# EAGLE board ROM-BANK_004 (EAGLE 6.3)
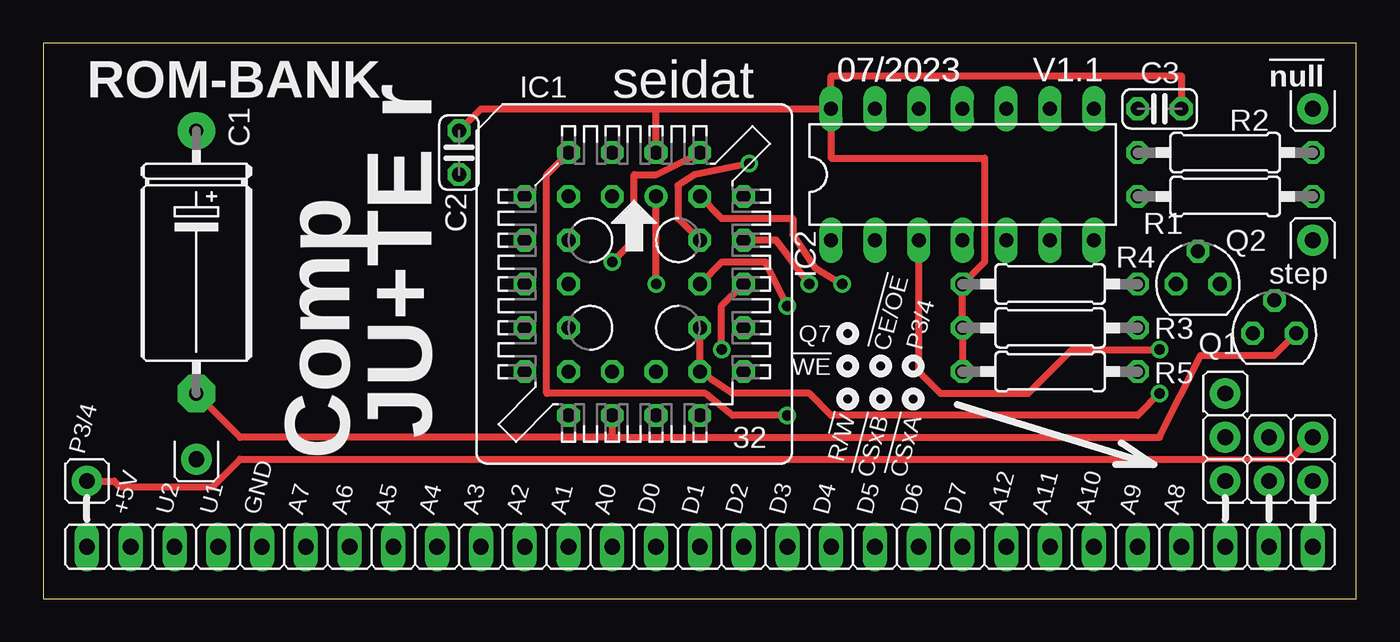
[diagram p0: board, top side]
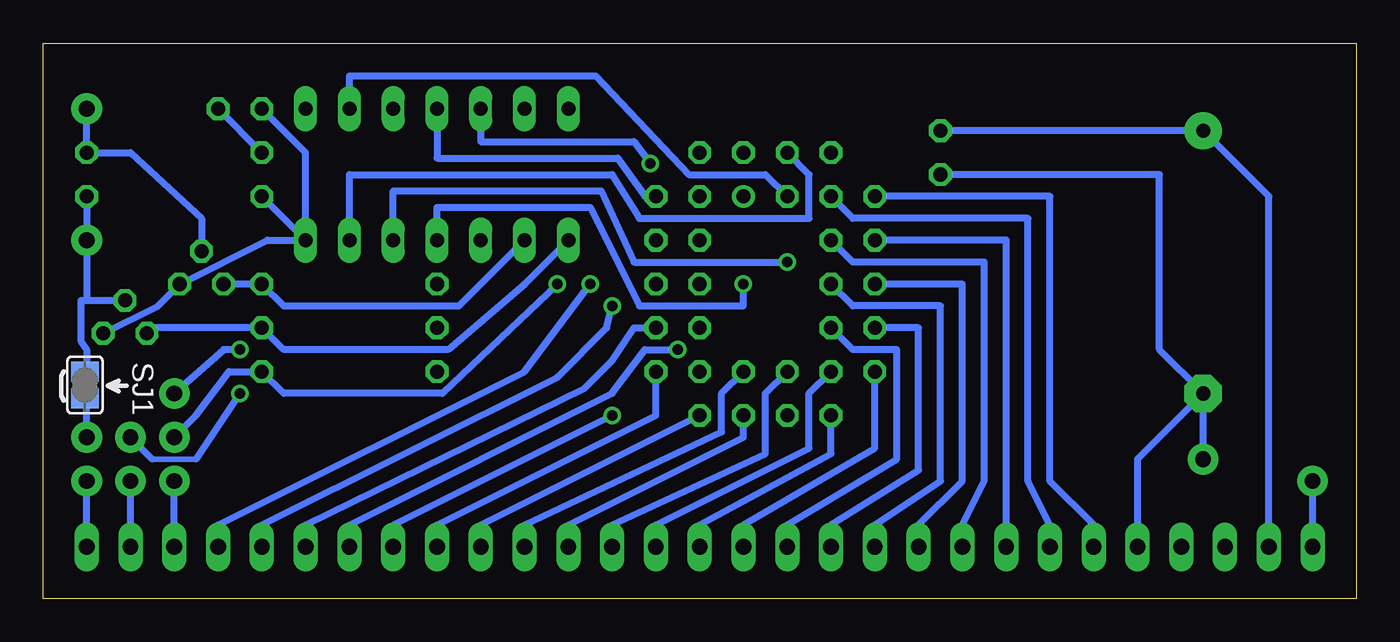
[diagram p1: board, bottom side, seen from below]

Size 76.19 x 32.22 mm. Coordinates in mm from the lower left corner, seen from the top.
Outline: 0,0 76.19,0 76.19,32.22 0,32.22 0,0
Copper layers (1*16): Top 0.035mm / dielectric 1.5mm / Bottom 0.035mm
Design rules "default": minimum track width 10mil, minimum drill 24mil, track to track 8mil, track to pad 8mil, pad to pad 8mil, via to via 8mil, smd to smd 8mil, copper to edge 40mil, drill to drill 8mil, minimum pad ring 10mil, minimum via ring 8mil, stop-mask expansion 4mil, vias tented up to drill 0mil, thermal gap 10mil

## Footprints (pad centres in the part's own frame; a part is rotated, then mirrored left to right if it is on the bottom)
JP1-1B = drill 0.914 pad 1.778: 1 0,0
E15-6 = drill 0.813 pad 2.159: + -7.62,0 | drill 0.813 pad 2.159 octagon: - 7.62,0
C025-024X044 = drill 0.813 octagon: 1 -1.27,0; 2 1.27,0
PLCC-32-SOCKET = drill 0.813: 1 1.27,5.08 | drill 0.813 octagon: 2 -1.27,7.62; 3 -1.27,5.08; 4 -3.81,7.62; 5 -6.35,5.08; 6 -3.81,5.08; 7 -6.35,2.54; 8 -3.81,2.54; 9 -6.35,0; 10 -3.81,0; 11 -6.35,-2.54; 12 -3.81,-2.54; 13 -6.35,-5.08; 14 -3.81,-7.62; 15 -3.81,-5.08; 16 -1.27,-7.62; 17 -1.27,-5.08; 18 1.27,-7.62; 19 1.27,-5.08; 20 3.81,-7.62; 21 6.35,-5.08; 22 3.81,-5.08; 23 6.35,-2.54; 24 3.81,-2.54; 25 6.35,0; 26 3.81,0; 27 6.35,2.54; 28 3.81,2.54; 29 6.35,5.08; 30 3.81,7.62; 31 3.81,5.08; 32 1.27,7.62
DIL14 = drill 0.813 long: 1 -7.62,-3.81; 2 -5.08,-3.81; 3 -2.54,-3.81; 4 0,-3.81; 5 2.54,-3.81; 6 5.08,-3.81; 7 7.62,-3.81; 8 7.62,3.81; 9 5.08,3.81; 10 2.54,3.81; 11 0,3.81; 12 -2.54,3.81; 13 -5.08,3.81; 14 -7.62,3.81
SOT54E = drill 0.813 octagon: D -1.27,0; G 0,1.905; S 1.27,0
0207/10 = drill 0.813 octagon: 1 -5.08,0; 2 5.08,0
SJ = smd 1.168 x 1.6: 1 -0.762,0; 2 0.762,0
BUS29_PUR = drill 0.914 long: 1.1 0,0; 1.2 0,2.54; 1.3 0,5.08; 1.4 0,7.62; 1.5 0,10.16; 1.6 0,12.7; 1.7 0,15.24; 1.8 0,17.78; 1.9 0,20.32; 1.10 0,22.86; 1.11 0,25.4; 1.12 0,27.94; 1.13 0,30.48; 1.14 0,33.02; 1.15 0,35.56; 1.16 0,38.1; 1.17 0,40.64; 1.18 0,43.18; 1.19 0,45.72; 1.20 0,48.26; 1.21 0,50.8; 1.22 0,53.34; 1.23 0,55.88; 1.24 0,58.42; 1.25 0,60.96; 1.26 0,63.5; 1.27 0,66.04; 1.28 0,68.58; 1.29 0,71.12

## Placement (x,y rotation side)
!NULL  [JP1-1B]  73.66,28.41 90 top
C1  200µ  [E15-6]  8.89,19.52 270 top
C2  100n  [C025-024X044]  24.13,25.87 270 top
C3  100n  [C025-024X044]  64.77,28.41 180 top
IC1  SST39VF040SOCKET  [PLCC-32-SOCKET]  34.29,18.25 0 top
IC2  4024N  [DIL14]  53.34,24.6 0 top
Q1  BS170  [SOT54E]  71.44,15.39 0 top
Q2  BS170  [SOT54E]  67,18.25 0 top
Q7  [JP1-1B]  68.58,11.9 270 top
R1  100k  [0207/10]  68.58,23.33 0 top
R2  100k  [0207/10]  68.58,25.87 180 top
R3  10k  [0207/10]  58.42,15.71 180 top
R4  10k  [0207/10]  58.42,18.25 180 top
R5  10k  [0207/10]  58.42,13.17 180 top
R/!W  [JP1-1B]  68.58,6.82 0 top
SCHRITT  [JP1-1B]  73.66,20.79 270 top
SJ1  [SJ]  73.76,12.39 270 bottom
U$1  BUS2929PUR  [BUS29_PUR]  2.54,3.01 270 top
U$2  [JP1-1B]  8.89,8.09 90 top
U$3  [JP1-1B]  73.66,9.36 180 top
U$4  [JP1-1B]  68.58,9.36 270 top
U$6  [JP1-1B]  2.54,6.82 90 top
U$8  [JP1-1B]  73.66,6.82 180 top
U$9  [JP1-1B]  71.12,6.82 180 top
U$10  [JP1-1B]  71.12,9.36 270 top

## Library data of the parts
!NULL Q7 R/!W SCHRITT U$1-U$4 U$6 U$8-U$10 = NRF24L01_Radio
C1-C3 R1-R5 = rcl
IC1 = memory
IC2 = 40xx
Q1 Q2 = transistor-small-signal
SJ1 = jumper

## Nets
!CE&OE: IC1.22 IC1.24 U$10.1
!CS1A: U$1.1.29 U$8.1
!CS1B: U$1.1.28 U$9.1
!NULL: !NULL.1 Q2.G R2.1
!WE: IC1.31 R5.1 U$4.1
A0: IC1.12 U$1.1.13
A1: IC1.11 U$1.1.12
A2: IC1.10 U$1.1.11
A3: IC1.9 U$1.1.10
A4: IC1.8 U$1.1.9
A5: IC1.7 U$1.1.8
A6: IC1.6 U$1.1.7
A7: IC1.5 U$1.1.6
A8: IC1.27 U$1.1.26
A9: IC1.26 U$1.1.25
A10: IC1.23 U$1.1.24
A11: IC1.25 U$1.1.23
A12: IC1.4 U$1.1.22
D0: IC1.13 U$1.1.14
D1: IC1.14 U$1.1.15
D2: IC1.15 U$1.1.16
D3: IC1.17 U$1.1.17
D4: IC1.18 U$1.1.18
D5: IC1.19 U$1.1.19
D6: IC1.20 U$1.1.20
D7: IC1.21 U$1.1.21
GND: C1.- C2.2 C3.2 IC1.16 IC2.7 Q1.S Q2.S R1.1 U$1.1.5 U$2.1
N$1: IC1.28 IC2.12
N$2: IC1.29 IC2.11
N$3: IC1.3 IC2.9
N$4: IC1.2 IC2.6
N$5: IC1.30 IC2.5
N$6: IC1.1 IC2.4
N$7: IC2.2 Q2.D R4.1
N$8: IC2.1 Q1.D R3.1
N$11: IC2.3 Q7.1
P3_4: SJ1.2 U$1.1.1 U$3.1 U$6.1
R/!W: R/!W.1 U$1.1.27
SCHRITT: Q1.G R1.2 SCHRITT.1 SJ1.1
U1: U$1.1.4
U2: U$1.1.3
VCC: C1.+ C2.1 C3.1 IC1.32 IC2.14 R2.2 R3.2 R4.2 R5.2 U$1.1.2

## Tracks (layer width: path | path; a pad name or v marks a point on that pad's centre or on a via)
!CE&OE  (via drill 0.61)
  Top 0.406: IC1.24 IC1.22 40.01,11.9 44.45,11.9 45.72,10.63 63.5,10.63 v64.77,11.9
  Bottom 0.305: 69.85,8.09 67.31,8.09
  Bottom 0.406: 67.31,8.09 v64.77,11.9 | U$10.1 69.85,8.09
!CS1A
  Bottom 0.406: U$1.1.29 U$8.1
!CS1B
  Bottom 0.406: U$1.1.28 U$9.1
!NULL
  Bottom 0.406: Q2.G 67,22.06 71.12,25.87 R2.1 !NULL.1
!WE  (via drill 0.61)
  Top 0.406: IC1.31 39.37,22.06 43.5,22.06 43.5,21.11 44.77,19.2 v46.35,18.25
  Bottom 0.406: U$4.1 67.31,10.63 65.41,13.17 R5.1 62.23,11.9 53.02,11.9 v46.35,18.25
A0
  Bottom 0.406: U$1.1.13 33.02,4.28 26.67,8.09 26.67,14.44 29.21,14.44 IC1.12
A1
  Bottom 0.406: U$1.1.12 30.48,4.28 25.4,7.46 25.4,15.71 IC1.11
A2
  Bottom 0.406: U$1.1.11 27.94,4.28 24.13,6.82 24.13,16.98 29.21,16.98 IC1.10
A3
  Bottom 0.406: U$1.1.10 25.4,4.28 22.86,6.82 22.86,18.25 IC1.9
A4
  Bottom 0.406: U$1.1.9 22.86,4.28 21.59,6.82 21.59,19.52 29.21,19.52 IC1.8
A5
  Bottom 0.406: U$1.1.8 20.32,20.79 IC1.7
A6
  Bottom 0.406: U$1.1.7 17.78,4.28 19.05,6.82 19.05,22.06 29.21,22.06 IC1.6
A7
  Bottom 0.406: U$1.1.6 15.24,4.28 17.78,6.82 17.78,23.33 IC1.5
A8  (via drill 0.61)
  Top 0.406: v44.45,18.25 42.55,20.79 IC1.27
  Bottom 0.406: U$1.1.26 66.04,4.28 48.26,13.17 v44.45,18.25
A9  (via drill 0.61)
  Top 0.406: v43.18,16.98 41.91,19.52 39.37,19.52 IC1.26
  Bottom 0.406: U$1.1.25 63.5,4.28 46.35,12.85 43.5,15.71 v43.18,16.98
A10
  Bottom 0.406: U$1.1.24 60.96,4.28 44.77,12.22 43.18,13.8 41.91,15.71 IC1.23
A11  (via drill 0.61)
  Top 0.406: v39.37,14.44 39.37,16.98 IC1.25
  Bottom 0.406: U$1.1.23 58.42,4.28 43.18,11.9 41.27,14.44 v39.37,14.44
A12  (via drill 0.61)
  Top 0.406: v43.18,10.63 40.01,10.63 38.42,11.9 29.21,11.9 29.21,24.6 IC1.4
  Bottom 0.406: U$1.1.22 55.88,4.28 v43.18,10.63
D0
  Bottom 0.406: U$1.1.14 35.56,4.28 27.94,8.72 IC1.13
D1
  Bottom 0.406: U$1.1.15 38.1,4.28 30.48,8.41 IC1.14
D2
  Bottom 0.406: U$1.1.16 40.64,4.28 31.75,8.72 31.75,11.9 IC1.15
D3
  Bottom 0.406: U$1.1.17 43.18,4.28 34.29,8.41 34.29,11.9 IC1.17
D4
  Bottom 0.406: U$1.1.18 45.72,4.28 35.56,9.36 IC1.18
D5
  Bottom 0.406: U$1.1.19 48.26,4.28 36.83,9.68 36.83,11.9 IC1.19
D6
  Bottom 0.406: U$1.1.20 50.8,4.28 IC1.20
D7
  Bottom 0.406: U$1.1.21 53.34,4.28 40.64,10.63 IC1.21
GND
  Top 0.406: 33.02,9.36 64.77,9.36 67.15,14.11 71.42,14.11 Q1.S | IC1.16 33.02,9.36 | 33.02,9.36 11.43,9.36 C1.-
  Bottom 0.406: IC2.7 63.19,20.79 Q2.S 69.53,16.97 Q1.S | R1.1 IC2.7 | C1.- 12.7,8.09 U$1.1.5 | C1.- 11.43,14.44 11.43,24.6 C2.2 | U$2.1 C1.- | C3.2 60.96,25.87 IC2.7
N$1  (via drill 0.61)
  Top 0.406: v40.96,25.23 37.78,24.6 36.83,23.96 36.83,22.06 IC1.28
  Bottom 0.406: IC2.12 50.8,26.5 41.91,26.5 v40.96,25.23
N$2
  Bottom 0.406: IC2.11 53.34,25.55 42.86,25.55 41.27,23.33 IC1.29
N$3
  Bottom 0.406: IC2.9 58.42,30.31 44.13,30.31 38.73,24.6 34.29,24.6 IC1.3
N$4
  Bottom 0.406: IC2.6 58.42,24.6 43.18,24.6 41.59,22.06 31.75,22.06 31.75,24.6 IC1.2
N$5  (via drill 0.61)
  Top 0.406: v33.02,19.52 34.29,20.79 34.29,24.6 35.56,24.6 IC1.30
  Bottom 0.406: IC2.5 55.88,23.65 43.81,23.65 41.91,19.52 v33.02,19.52
N$6  (via drill 0.61)
  Top 0.406: v35.56,18.25 IC1.1
  Bottom 0.406: IC2.4 53.34,22.7 44.45,22.7 41.59,16.98 35.56,16.98 v35.56,18.25
N$7
  Bottom 0.406: Q2.D R4.1 62.23,16.98 52.07,16.98 IC2.2
N$8
  Bottom 0.406: Q1.D 69.85,15.71 R3.1 62.23,14.44 52.7,14.44 48.26,18.25 IC2.1
N$9
  Bottom 0.254: 74.36,12.73 74.36,11.65
N$11  (via drill 0.61)
  Top 0.406: IC2.3 50.8,13.17 52.07,11.9 57.15,11.9 59.69,14.44 v64.77,14.44
  Bottom 0.406: Q7.1 65.72,14.44 v64.77,14.44
P3_4
  Top 0.305: 67.31,8.09 72.39,8.09
  Top 0.406: 72.39,8.09 U$3.1 | 67.31,8.09 11.43,8.09 9.84,6.5 4.45,6.5 4.13,6.82 U$6.1
  Bottom 0.254: 73.66,11.9 SJ1.2
  Bottom 0.406: U$1.1.1 U$6.1 | U$3.1 73.66,11.9
R/!W
  Bottom 0.406: U$1.1.27 R/!W.1
SCHRITT
  Bottom 0.254: 73.66,13.17 SJ1.1 | Q1.G
  Bottom 0.406: R1.2 SCHRITT.1 73.66,17.33 73.74,17.29 | 73.74,17.29 Q1.G | 73.66,13.17 73.66,14.44 74,14.93 74,17.29 73.74,17.29 | Q1.G 73.74,17.29
VCC
  Top 0.406: IC2.14 45.72,30.31 66.04,30.31 C3.1 | IC2.14 45.72,25.55 54.61,25.55 54.61,19.52 R4.2 R3.2 R5.2 | C2.1 25.4,28.41 35.56,28.41 | 35.56,28.41 IC2.14 | IC1.32 35.56,28.41
  Bottom 0.406: C2.1 C1.+ 5.08,23.33 U$1.1.2 | C3.1 R2.2

## Text on the board
tPlace: V1.1 | r | P3/4 | R/!W | !CSxB | !CSxA | JU+TE | P3/4 | Comp | +5V | U2 | U1 | GND | A7 | A6 | A5 | A4 | A3 | A2 | A1 | A0 | D0 | D1 | D2 | D3 | D4 | D5 | D6 | D7 | A12 | A11 | A10 | A9 | A8
tNames: 07/2023 | 07/2023 | 07/2023 | ROM-BANK | seidat | !null | step | Q7 | !CE/OE | !WE